# EAGLE board OPA1656IDR-breakout_v1 (EAGLE 9.7.0)
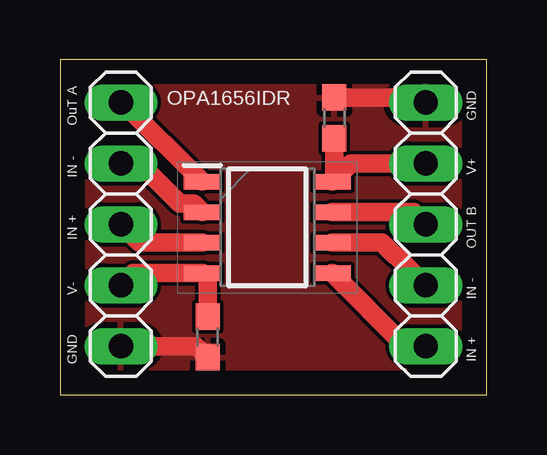
[diagram p0: board, top side]

Size 17.78 x 13.97 mm. Coordinates in mm from the lower left corner, seen from the top.
Outline: 0,0 17.78,0 17.78,13.97 0,13.97 0,0
Copper layers (1*16): Top 0.035mm / dielectric 1.5mm / Bottom 0.035mm
Design rules "Fusion Electronics Design Rules": minimum track width 6mil, minimum drill 0.35mm, track to track 6mil, track to pad 6mil, pad to pad 6mil, via to via 6mil, smd to smd 6mil, copper to edge 40mil, drill to drill 6mil, minimum pad ring 10mil, minimum via ring 8mil, stop-mask expansion 4mil, vias tented up to drill 9999mil, thermal gap 10mil

## Footprints (pad centres in the part's own frame; a part is rotated, then mirrored left to right if it is on the bottom)
0603 = smd 1.1 x 1: 1 -0.85,0; 2 0.85,0
SOIC127P600X175-8N = smd 1.528 x 0.65: 1 -2.711,1.905; 2 -2.711,0.635; 3 -2.711,-0.635; 4 -2.711,-1.905; 5 2.711,-1.905; 6 2.711,-0.635; 7 2.711,0.635; 8 2.711,1.905
1X05 = drill 1.016 long: 1 -5.08,0; 2 -2.54,0; 3 0,0; 4 2.54,0; 5 5.08,0

## Placement (x,y rotation side)
C1  0.1uF  [0603]  11.43,11.55 270 top
C2  0.1uF  [0603]  6.15,2.42 270 top
IC1  OPA1656IDR  [SOIC127P600X175-8N]  8.64,6.99 0 top
JP1  PINHD-1X5  [1X05]  2.54,7.11 270 top
JP2  PINHD-1X5  [1X05]  15.24,7.11 270 top

## Library data of the parts
C1 C2 = SparkFun-Capacitors; PROD_ID: CAP-08390
IC1 = OPA1656IDR; DESCRIPTION: SoundPlus ultra-low noise and distortion, audio operational amplifier; HEIGHT: 1.75mm; MANUFACTURER_NAME: Texas Instruments; MANUFACTURER_PART_NUMBER: OPA1656IDR; MOUSER_PART_NUMBER: 595-OPA1656IDR; MOUSER_PRICE-STOCK: https://www.mouser.co.uk/ProductDetail/Texas-Instruments/OPA1656IDR?qs=vLWxofP3U2ztlJVp%252BbIcnQ%3D%3D
JP1 JP2 = Connector; CATEGORY: Headers; DESCRIPTION: Header-Straight-5 Position; PACKAGE_TYPE: THT; PITCH: 0.100" (2.54mm); SUBCATEGORY: Headers-Male Pins; TYPE: Board to Board or Cable-Unshrouded-Through Hole-Straight

## Nets
GND: C1.1 C2.2 JP1.5 JP2.1
N$1: IC1.1 JP1.1
N$2: IC1.2 JP1.2
N$3: IC1.3 JP1.3
N$4: C2.1 IC1.4 JP1.4
N$5: IC1.5 JP2.5
N$6: IC1.6 JP2.4
N$7: IC1.7 JP2.3
N$8: C1.2 IC1.8 JP2.2

## Tracks (layer width: path | path; a pad name or v marks a point on that pad's centre or on a via)
GND
  Top 0.762: JP2.1 15.03,12.4 C1.1 | JP1.5 5.68,2.03 C2.2
  pour Top: -1.19,-1.19 20.24,-1.19 20.24,15.16 -1.19,15.16
N$1
  Top 0.762: IC1.1 2.62,12.19 JP1.1
N$2
  Top 0.762: IC1.2 5.57,7.98 5,7.98 3.32,9.65 JP1.2
N$3
  Top 0.762: IC1.3 3.3,6.35 JP1.3
N$4
  Top 0.762: JP1.4 3.05,5.08 IC1.4 6.15,4.86 C2.1
N$5
  Top 0.762: IC1.5 14.39,2.03 JP2.5
N$6
  Top 0.762: IC1.6 13.41,6.35 13.94,5.82 13.99,5.82 JP2.4
N$7
  Top 0.762: IC1.7 14.73,7.62 JP2.3
N$8
  Top 0.762: C1.2 11.43,8.97 IC1.8 12.11,9.65 JP2.2

## Text on the board
tPlace: OPA1656IDR | OuT A | GND | IN - | V+ | IN + | OUT B | V- | IN - | GND | IN +